# Altium PCB Main_Board.PcbDoc (part 5 of 14)
Units mm, origin at the board's own origin, x right, y up, seen from the top; angles counter-clockwise.
Board outline 142 x 82 mm, 10 copper layers (L1_Top, L2_PWR1, L3_Sig1, L4_GND1, L5_Sig2, L6_Sig3, L7_GND2, L8_Sig4, L9_GND3, L8_Bottom), stack 1.71 mm thick; 299 components, 328 nets, 2329 pads, 2908 vias.
Unrouted connection lines stored in the file: 2.
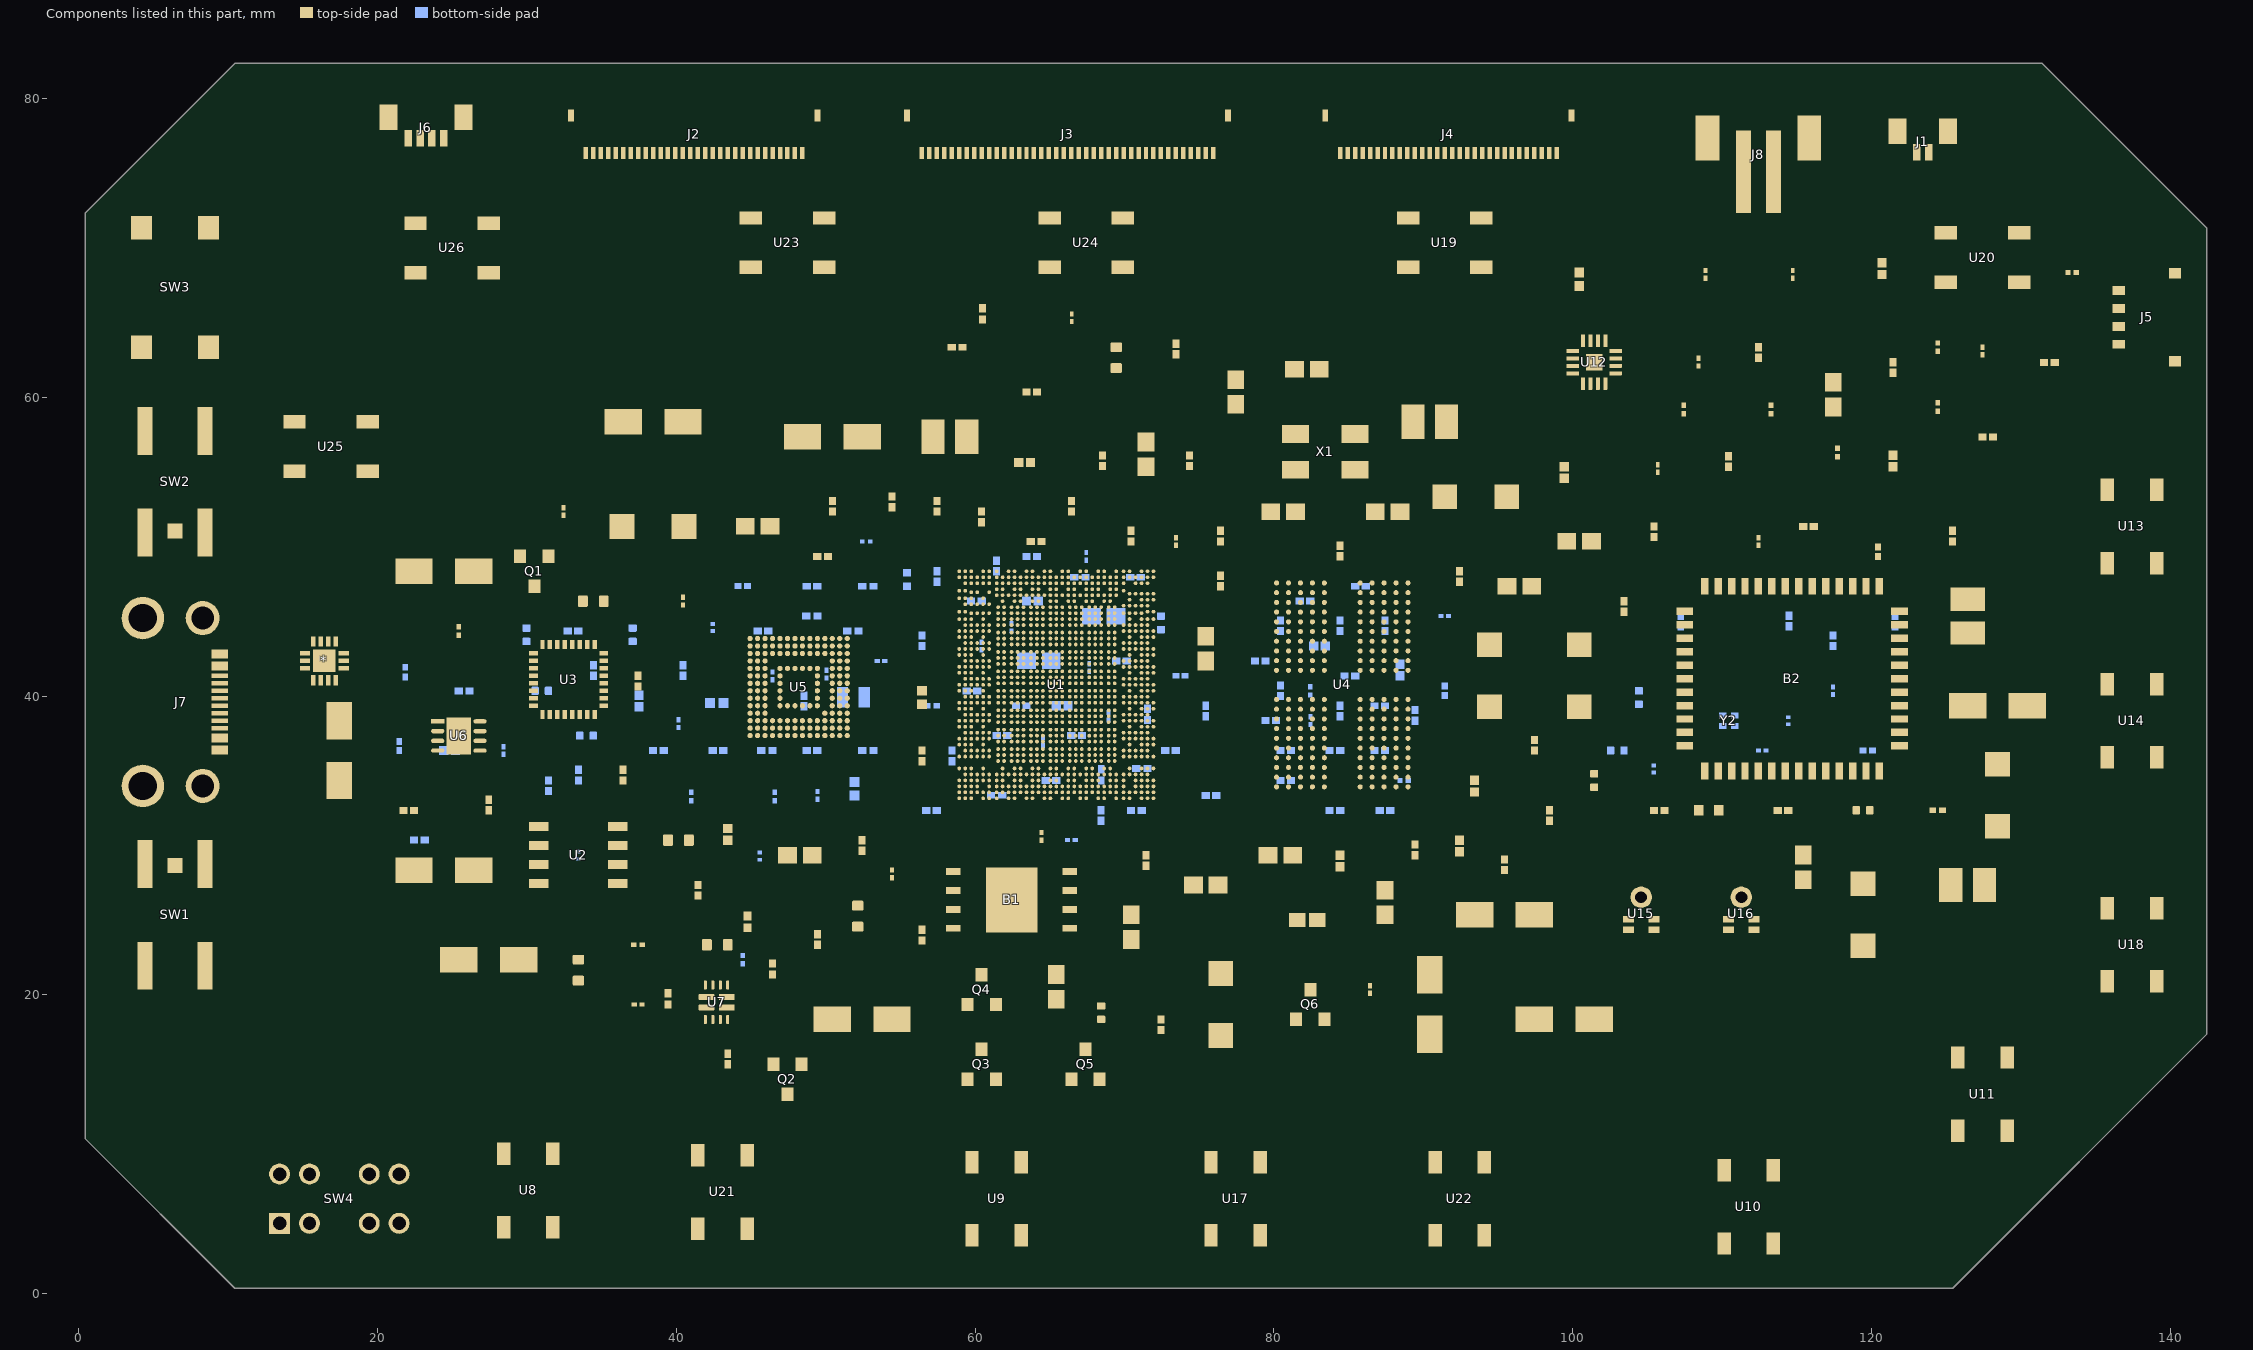
[diagram p13: the components of this part, seen from the top]

## Components (designator, comment, footprint, x,y, rotation, side; value= is the part's Value field where it differs from the comment) (continued)
C124 "GRM155R60G106ME47D" FP-GRM155-0_2-0_1-IPC_C 24.83,36.349 r180 bottom value=10µF
C125 "CC0201KRX5R7BB104" FP-CC0201-BA-IPC_A 56.441,43.704 r90 bottom value=100nF
C126 "GRM0335C1E220FA01D" FP-GRM033-0_03-MFG 105.441,35.112 r90 bottom value=22pF
C127 "GRM0335C1E220FA01D" FP-GRM033-0_03-MFG 114.441,38.349 r90 bottom value=22pF
C128 "Capacitor 100nF +/-20% 50V 0402" CAPC0402(1005)60_L 37.079,44.101 r90 bottom value=100nF
C129 "Capacitor 10µF +/-40% 6.3V 0402" CAPC0402(1005)60_L 29.967,44.101 r90 bottom value=10µF
C130 "GRM035R60J475ME15J" FP-GRM035-0_09-IPC_B 119.755,36.349 r180 bottom value=4.7µF
C131 "0201ZD105MAT2A" CAPC0603X33X15LL03T05 44.441,22.349 r270 bottom value=1µF
C132 "CC0201KRX5R7BB104" FP-CC0201-BA-IPC_A 115.796,51.349 r180 top value=100nF
C133 "CC0201KRX5R7BB104" FP-CC0201-BA-IPC_A 58.796,63.349 r180 top value=100nF
C134 "Capacitor 10µF +/-20% 10V 0603" CAPC0603(1608)100_L 69.441,62.649 r90 top value=10µF
C135 "Capacitor 10µF +/-20% 10V 0603" CAPC0603(1608)100_L 33.441,21.649 r90 top value=10µF
C136 "Capacitor 10µF +/-20% 10V 0603" CAPC0603(1608)100_L 42.741,23.349 r180 top value=10µF
C137 "Capacitor 100nF +/-20% 50V 0402" CAPC0402(1005)60_L 68.441,18.799 r90 top value=100nF
C138 "GRM035R60J475ME15J" FP-GRM035-0_09-IPC_B 120.441,49.663 r90 top value=4.7µF
C139 "0201YC221KAT2A" CAPC0603X33X15LL03T05 37.441,23.349 r180 top value=220pF
C140 "0201YC221KAT2A" CAPC0603X33X15LL03T05 25.441,44.349 r90 top value=220pF
C141 "Capacitor 10µF +/-40% 6.3V 0402" CAPC0402(1005)60_L 101.441,34.349 r90 top value=10µF
C142 "CC0201KRX5R7BB104" FP-CC0201-BA-IPC_A 105.796,32.349 r0 top value=100nF
C143 "Capacitor 10µF +/-40% 6.3V 0402" CAPC0402(1005)60_L 119.441,32.349 r0 top value=10µF
C144 "CC0201KRX5R7BB104" FP-CC0201-BA-IPC_A 114.087,32.349 r0 top value=100nF
C145 "Capacitor 10µF +/-20% 10V 0603" CAPC0603(1608)100_L 34.441,46.349 r180 top value=10µF
C146 "Capacitor 10µF +/-20% 10V 0603" CAPC0603(1608)100_L 40.141,30.349 r180 top value=10µF
C147 "Capacitor 0.1 uF +/- 5% 16 V 0402" CAPC1005X56X25LL10T15 44.776,24.884 r90 top value=100nF
C148 "Capacitor 10µF +/-20% 10V 0603" CAPC0603(1608)100_L 52.142,25.265 r90 top value=10µF
C149 "CC0201KRX5R7BB104" FP-CC0201-BA-IPC_A 117.441,43.704 r90 bottom value=100nF
C150 "CC0201KRX5R7BB104" FP-CC0201-BA-IPC_A 114.477,45.016 r90 bottom value=100nF
C151 "CC0201KRX5R7BB104" FP-CC0201-BA-IPC_A 107.238,45.016 r90 bottom value=100nF
D1 "SBRT3U45SA-13" FP-SMA-MFG 17.441,36.349 r90 top
D2 "SBRT3U45SA-13" FP-SMA-MFG 24.441,28.349 r180 top
D3 "SBRT3U45SA-13" FP-SMA-MFG 95.441,25.349 r180 top
D4 "SBRT3U45SA-13" FP-SMA-MFG 128.441,39.349 r0 top
D5 "SBRT3U45SA-13" FP-SMA-MFG 24.441,48.349 r0 top
D6 "SBRT3U45SA-13" FP-SMA-MFG 27.441,22.349 r0 top
D7 "SBRT3U45SA-13" FP-SMA-MFG 50.441,57.349 r0 top
D8 "SBRT3U45SA-13" FP-SMA-MFG 38.441,58.349 r180 top
D9 "SBRT3U45SA-13" FP-SMA-MFG 99.441,18.349 r180 top
D10 "SBRT3U45SA-13" FP-SMA-MFG 90.441,19.349 r90 top
D11 "PTVS33VP1BPLJ" FP-SOD128FL-1-CA_MFG 93.516,53.349 r0 top
D12 "SBRT3U45SA-13" FP-SMA-MFG 52.441,18.349 r180 top
D13 "PTVS33VP1BPLJ" FP-SOD128FL-1-CA_MFG 128.441,33.349 r90 top
D14 "PTVS33VP1BPLJ" FP-SOD128FL-1-CA_MFG 76.441,19.349 r90 top
D15 "PTVS33VP1BPLJ" FP-SOD128FL-1-CA_MFG 94.441,41.349 r90 top
D16 "PTVS33VP1BPLJ" FP-SOD128FL-1-CA_MFG 100.441,41.349 r270 top
D17 "PTVS33VP1BPLJ" FP-SOD128FL-1-CA_MFG 38.441,51.349 r0 top
D18 "PTVS33VP1BPLJ" FP-SOD128FL-1-CA_MFG 119.441,25.349 r270 top
J1 "BM02B-SURS-TF(LF)(SN)" FP-BM02B-SURS-TF_LF_SN-MFG 123.441,77.349 r0 top
J2 "FH34SRJ-30S-0.5SH_99_" FH34SRJ30S05SH99 41.191,77.499 r180 top
J3 "FH34SRJ-40S-0.5SH_50_" FH34SRJ40S05SH50 66.191,77.499 r180 top
J4 "FH34SRJ-30S-0.5SH_99_" FH34SRJ30S05SH99 91.691,77.499 r180 top
J5 "78171-0004" 781710004 138.441,65.349 r90 top
J6 "BM04B-SURS-TF(LF)(SN)" JST_BM04B-SURS-TF(LF)(SN) 23.241,78.299 r0 top
J7 "HC-TYPE-C-16P-CB1.0" HCTYPEC16PCB10 5.816,39.599 r270 top
J8 "B2B-PH-SM4-TB(LF)(SN)" FP-B2B-PH-SM4-TB_LF_SN-MFG 112.441,77.349 r0 top
L1 "LQP03TNR11H02D" FP-LQP03PN_02-MFG 52.716,50.349 r180 bottom
L2 "LQM2HPN2R2MJ0L" FP-LQM2HPN_J0-IPC_A 90.441,58.349 r0 top value=2.2µH
L3 "LQM2HPN2R2MJ0L" FP-LQM2HPN_J0-IPC_A 58.316,57.349 r0 top value=2.2µH
L4 "LQM2HPN2R2MJ0L" FP-LQM2HPN_J0-IPC_A 126.441,27.349 r0 top
L5 "LQM2HPN2R2MJ0L" FP-LQM2HPN_J0-IPC_A 126.441,45.349 r270 top
L6 "LQM18DN100M70L" FP-LQM18DN_70-MFG 109.116,32.349 r0 top value=1.365H
L7 "LQM18DN100M70L" FP-LQM18DN_70-IPC_B 82.241,25.011 r0 top
Q1 "DMN3042L-13" FP-SOT23-MFG 30.491,48.349 r270 top
Q2 "DMN3042L-13" FP-SOT23-MFG 47.441,14.349 r270 top
Q3 "DMN3042L-13" FP-SOT23-MFG 60.441,15.349 r90 top
Q4 "DMN3042L-13" FP-SOT23-MFG 60.441,20.349 r90 top
Q5 "DMN3042L-13" FP-SOT23-MFG 67.391,15.349 r90 top
Q6 "DMN3042L-13" FP-SOT23-MFG 82.441,19.349 r90 top
R1 "RMCF0201JT100R" FP-RMCF0201-IPC_A 87.441,32.349 r0 bottom value=100
R2 "RMCF0201JT3R30" FP-RMCF0201-IPC_A 70.741,47.949 r180 bottom value=3.3
R3 "MCRE000140" RESC0603X26X15NL03T05 57.116,39.349 r180 bottom value=1k
R4 "RMCF0201JT100R" FP-RMCF0201-IPC_A 63.796,49.349 r0 bottom value=100
R5 "HCJ0201ZT0R00" FP-HCJ0201-IPC_C 112.696,36.349 r180 bottom value=0
R6 "CRCW020122R0JNED" RESC0603X28X15ML05T05 52.816,47.349 r180 bottom value=22
R11 "ERJ-1GNF2261C" FP-ERJ1GN-IPC_B 73.746,41.349 r180 bottom value=2.26k
R14 "RT0201BRE0710KL" FP-RT0201-IPC_C 117.441,40.349 r90 bottom value=10k
R15 "RT0201BRE0710KL" FP-RT0201-IPC_C 28.441,36.349 r90 bottom value=10k
R16 "RMCF0201JT4K70" FP-RMCF0201-IPC_A 49.087,36.349 r180 bottom value=4.7k
R17 "RT0201BRE0710KL" FP-RT0201-IPC_C 46.441,41.349 r270 bottom value=10k
R18 "RMCF0201JT4K70" FP-RMCF0201-IPC_A 48.555,39.661 r90 bottom value=4.7k
R19 "CRCW020156K0JNED" RESC0603X28X15ML05T05 61.441,33.349 r0 bottom value=56k
R20 "RMCF0201JT2K00" FP-RMCF0201-IPC_A 31.441,33.995 r90 bottom value=2k
R21 "HCJ0201ZT0R00" FP-HCJ0201-IPC_C 49.441,33.349 r270 bottom value=0
R22 "RMCF0201JT100R" FP-RMCF0201-IPC_A 64.087,50.349 r180 top value=100
R23 "RMCF0201JT2K00" FP-RMCF0201-IPC_A 73.458,63.228 r90 top value=2k
R24 "HCJ0201ZT0R00" FP-HCJ0201-IPC_C 66.472,65.323 r90 top value=0
R25 "CRCW020139K0JNED" RESC0603X28X15ML05T05 60.503,65.577 r90 top value=39k
R26 "RMCF0201JT100R" FP-RMCF0201-IPC_A 112.441,62.995 r90 top value=100
R27 "RT0201BRE0710KL" FP-RT0201-IPC_C 114.739,68.227 r90 top value=10k
R28 "RT0201BRE0710KL" FP-RT0201-IPC_C 108.897,68.227 r90 top value=10k
R29 "RT0201BRE0710KL" FP-RT0201-IPC_C 108.441,62.349 r90 top value=10k
R30 "RT0201BRE0710KL" FP-RT0201-IPC_C 105.7,55.227 r90 top value=10k
R31 "HCJ0201ZT0R00" FP-HCJ0201-IPC_C 40.141,38.152 r90 bottom value=0
R32 "RT0201BRE0710KL" FP-RT0201-IPC_C 32.441,52.349 r90 top value=10k
R33 "RMCF0201JT100R" FP-RMCF0201-IPC_A 57.441,52.704 r90 top value=100
R34 "RT0201BRE0710KL" FP-RT0201-IPC_C 40.441,46.349 r90 top value=10k
R35 "RMCF0201JT100R" FP-RMCF0201-IPC_A 37.441,40.995 r90 top value=100
R36 "HCJ0201ZT0R00" FP-HCJ0201-IPC_C 73.441,50.349 r90 top value=0
R37 "RT0201BRE0710KL" FP-RT0201-IPC_C 64.541,36.949 r90 bottom value=10k
R38 "RT0201BRE0710KL" FP-RT0201-IPC_C 86.441,20.349 r90 top value=10k
R39 "RT0201BRE0710KL" FP-RT0201-IPC_C 82.441,38.349 r90 bottom value=10k
R40 "RT0201BRE0710KL" FP-RT0201-IPC_C 68.941,38.649 r90 bottom value=10k
R41 "RMCF0201JT4K70" FP-RMCF0201-IPC_A 125.441,50.704 r90 top value=4.7k
R42 "RT0201BRE0710KL" FP-RT0201-IPC_C 112.441,50.349 r270 top value=10k
R43 "CRCW020122R0JNED" RESC0603X28X15ML05T05 52.816,36.349 r0 bottom value=22
R44 "CRCW020122R0JNED" RESC0603X28X15ML05T05 49.066,45.349 r0 bottom value=22
R45 "RT0201BRE0710KL" FP-RT0201-IPC_C 54.441,28.095 r90 top value=10k
R46 "RMCF0201JT4K70" FP-RMCF0201-IPC_A 57.087,32.349 r0 bottom value=4.7k
R47 "RMCF0201JT4K70" FP-RMCF0201-IPC_A 38.796,36.349 r180 bottom value=4.7k
R48 "RT0201BRE0710KL" FP-RT0201-IPC_C 64.441,30.604 r90 top value=10k
R49 "RMCF0201JT4K70" FP-RMCF0201-IPC_A 36.441,34.704 r90 top value=4.7k
R50 "RMCF0201JT47K0" FP-RMCF0201-IPC_A 49.441,23.704 r90 top
R51 "RT0201BRE0710KL" FP-RT0201-IPC_C 66.441,30.349 r180 bottom value=10k
R52 "CRCW020122R0JNED" RESC0603X28X15ML05T05 68.441,34.724 r90 bottom value=22
R53 "CRCW020122R0JNED" RESC0603X28X15ML05T05 71.541,38.774 r90 bottom value=22
R54 "CRCW020122R0JNED" RESC0603X28X15ML05T05 71.166,35.149 r180 bottom value=22
R55 "AF0201FR-07499RL" FP-AF0201-IPC_B 21.441,36.654 r90 bottom value=499
R56 "CRCW020122R0JNED" RESC0603X28X15ML05T05 67.016,47.949 r0 bottom value=22
R57 "RT0201BRE0710KL" FP-RT0201-IPC_C 53.696,42.349 r180 bottom value=10k
R58 "RMCF0201JT47K0" FP-RMCF0201-IPC_A 121.441,61.995 r90 top
R59 "RMCF0201JT47K0" FP-RMCF0201-IPC_A 25.796,40.349 r180 bottom
R60 "RMCF0201JT100R" FP-RMCF0201-IPC_A 76.441,47.704 r90 top value=100
R61 "RT0201BRE0710KL" FP-RT0201-IPC_C 67.441,49.349 r90 bottom value=10k
R62 "HCJ0201ZT0R00" FP-HCJ0201-IPC_C 60.441,43.349 r90 bottom value=0
R63 "HCJ0201ZT0R00" FP-HCJ0201-IPC_C 91.441,45.349 r180 bottom value=0
R64 "RMCF0201JT100R" FP-RMCF0201-IPC_A 22.087,32.349 r180 top value=100
R65 "CRG0201F100K" RESC0603X26X15NL03T05 21.855,41.593 r90 bottom value=100k
R66 "CRCW020122K0JNED" RESC0603X28X15ML05T05 51.816,44.349 r180 bottom value=22k
R67 "CRCW02015K10JNED" RESC0603X28X15ML05T05 46.066,36.349 r180 bottom value=5.1k
R68 "RT0201BRE0710KL" FP-RT0201-IPC_C 50.049,41.466 r90 bottom value=10k
R69 "CRG0201F100K" RESC0603X26X15NL03T05 124.441,32.349 r180 top value=100k
R70 "HCJ0201ZT0R00" FP-HCJ0201-IPC_C 127.441,63.095 r90 top value=0
R71 "CRCW02015K10JNED" RESC0603X28X15ML05T05 46.441,21.724 r270 top value=5.1k
R72 "RMCF0201JT100R" FP-RMCF0201-IPC_A 70.441,50.704 r90 top value=100
R73 "CRCW02015K10JNED" RESC0603X28X15ML05T05 39.441,19.724 r270 top value=5.1k
R74 "RMCF0201JT13K0" FP-RMCF0201-IPC_A 43.441,15.704 r270 top value=13k
R75 "RMCF0201JT2R20" FP-RMCF0201-IPC_A 49.796,49.349 r180 top value=2.2
R76 "RMCF0201JT2R20" FP-RMCF0201-IPC_A 27.441,32.704 r90 top value=2.2
R77 "HCJ0201ZT0R00" FP-HCJ0201-IPC_C 67.641,41.904 r90 bottom value=0
R78 "HCJ0201ZT0R00" FP-HCJ0201-IPC_C 62.441,44.604 r90 bottom value=0
R79 "HCJ0201ZT0R00" FP-HCJ0201-IPC_C 37.441,19.349 r0 top value=0
SW1 "EVQ-Q2H03W" FP-EVQ-Q2H03W-MFG 6.441,25.349 r270 top
SW2 "EVQ-Q2H03W" FP-EVQ-Q2H03W-MFG 6.441,54.349 r90 top
SW3 "B3FS-1012P" FP-B3FS-1012P-MFG 6.441,67.349 r90 top
SW4 "JS203011AQN" FP-JS203011AQN-MFG 17.441,5.349 r0 top
U1 "Amlogic A311D2" BGA1058C40P33X37_1430X1610X110 65.568,40.849 r0 top
U2 "PCF8563T/5,518" FP-SOT96-1-MFG 33.441,29.349 r180 top
U3 "STM32G031K6U6" UFQFPN-32 32.791,41.099 r0 top
U4 "MT53D1024M32D4DT-046_AIT_D" BGA200C65P12X22_1000X1450X95 84.58,40.743 r180 top
U5 "KLMAG2GEND-B031" BGA153N50P14X14_1150X1300X80N 48.191,40.599 r180 top
U6 "TPS2115ADRBR" FP-DRB0008B-IPC_B 25.443,37.324 r0 top
U7 "TPS2121RUXR" FP-RUX0012A-MFG 42.691,19.499 r0 top
U8 "WS2812B-B" LED_WS2812B-B 30.091,6.899 r90 top
U9 "WS2812B-B" LED_WS2812B-B 61.441,6.349 r90 top
U10 "WS2812B-B" LED_WS2812B-B 111.791,5.799 r90 top
U11 "WS2812B-B" LED_WS2812B-B 127.441,13.349 r90 top
U12 "MAX98357AETE+T" QFN50P300X300X80-17N 101.441,62.349 r90 top
U13 "WS2812B-B" LED_WS2812B-B 137.441,51.349 r270 top
U14 "WS2812B-B" LED_WS2812B-B 137.441,38.349 r90 top
U15 "IM67D120AXTSA1" FP-PG-LLGA-5-MFG#1 104.591,25.849 r0 top
U16 "IM67D120AXTSA1" FP-PG-LLGA-5-MFG#2 111.291,25.849 r0 top
U17 "WS2812B-B" LED_WS2812B-B 77.441,6.349 r90 top
U18 "WS2812B-B" LED_WS2812B-B 137.441,23.349 r90 top
U19 "WS2812B-B" LED_WS2812B-B 91.441,70.349 r0 top
U20 "WS2812B-B" LED_WS2812B-B 127.441,69.349 r0 top
U21 "WS2812B-B" LED_WS2812B-B 43.091,6.799 r90 top
U22 "WS2812B-B" LED_WS2812B-B 92.441,6.349 r90 top
U23 "WS2812B-B" LED_WS2812B-B 47.441,70.349 r0 top
U24 "WS2812B-B" LED_WS2812B-B 67.441,70.349 r0 top
U25 "WS2812B-B" LED_WS2812B-B 16.891,56.699 r0 top
U26 "WS2812B-B" LED_WS2812B-B 24.991,69.999 r0 top
X1 "ABM3B-24.000MHZ-B2-T" ABRA-ABM3B-4_V 83.441,56.349 r180 top
Y1 "ABS06-127-32.768KHZ-T" FP-ABS06-MFG 51.857,39.915 r180 bottom
Y2 "ABM13W-37.4000MHZ-5-K1Z-T5" FP-ABM13W-MFG 110.441,38.349 r0 bottom

## Footprints (in the part's own frame and the unit in brackets; to place one, negate y for a bottom-side part, rotate by r counter-clockwise, add the part's x,y. Pads: shape width x height; smd on the part's side, far side on the other; paste and mask are expansions set on the pad)
781710004 [mm]
  rect 0.6x0.85 smd: 1(-1.8,1.875) 2(-0.6,1.875) 3(0.6,1.875) 4(1.8,1.875)
  rect 0.7x0.8 smd: MP1(-2.95,-1.9) MP2(2.95,-1.9)
  silkscreen extent -3.3,-2.62 3.3,2.6, body extent -3.17,-2.76 3.43,1.77, height 1.4
ABRA-ABM3B-4_V [mm] "SMD, 4-Leads, Body 5x3.2mm"
  rect 1.8x1.2 smd: 1(-2,-1.2) 2(2,-1.2) 3(2,1.2) 4(-2,1.2)
  silkscreen extent -3.58,-1.6 2.5,1.6, body extent -2.5,-1.59 2.5,1.59, height 1.13
AP6275S [mm]
  rect 1.125x0.5 smd: 1(-7.188,4.5) 2(-7.188,3.6) 3(-7.188,2.7) 4(-7.188,1.8) 5(-7.188,0.9) 6(-7.188,0) 7(-7.188,-0.9) 8(-7.188,-1.8) 9(-7.188,-2.7) 10(-7.188,-3.6) 11(-7.188,-4.5) 26(7.188,-4.5) 27(7.188,-3.6) 28(7.188,-2.7) 29(7.188,-1.8) 30(7.188,-0.9) 31(7.188,0) 32(7.188,0.9) 33(7.188,1.8) 34(7.188,2.7) 35(7.188,3.6) 36(7.188,4.5)
  rect 0.5x1.125 smd: 12(-5.85,-6.188) 13(-4.95,-6.188) 14(-4.05,-6.188) 15(-3.15,-6.188) 16(-2.25,-6.188) 17(-1.35,-6.188) 18(-0.45,-6.188) 19(0.45,-6.188) 20(1.35,-6.188) 21(2.25,-6.188) 22(3.15,-6.188) 23(4.05,-6.188) 24(4.95,-6.188) 25(5.85,-6.188) 37(5.85,6.188) 38(4.95,6.188) 39(4.05,6.188) 40(3.15,6.188) 41(2.25,6.188) 42(1.35,6.188) 43(0.45,6.188) 44(-0.45,6.188) 45(-1.35,6.188) 46(-2.25,6.188) 47(-3.15,6.188) 48(-4.05,6.188) 49(-4.95,6.188) 50(-5.85,6.188)
  silkscreen extent -8.3,-6.5 7.5,6.5, body extent -7.5,-6.5 7.5,6.5, height 1.65
BGA153N50P14X14_1150X1300X80N [mm]
  round 0.35 smd: A1(-3.25,3.25) A2(-2.75,3.25) A3(-2.25,3.25) A4(-1.75,3.25) A5(-1.25,3.25) A6(-0.75,3.25) A7(-0.25,3.25) A8(0.25,3.25) A9(0.75,3.25) A10(1.25,3.25) A11(1.75,3.25) A12(2.25,3.25) A13(2.75,3.25) A14(3.25,3.25) B1(-3.25,2.75) B2(-2.75,2.75) B3(-2.25,2.75) B4(-1.75,2.75) B5(-1.25,2.75) B6(-0.75,2.75) B7(-0.25,2.75) B8(0.25,2.75) B9(0.75,2.75) B10(1.25,2.75) B11(1.75,2.75) B12(2.25,2.75) B13(2.75,2.75) B14(3.25,2.75) C1(-3.25,2.25) C2(-2.75,2.25) C3(-2.25,2.25) C4(-1.75,2.25) C5(-1.25,2.25) C6(-0.75,2.25) C7(-0.25,2.25) C8(0.25,2.25) C9(0.75,2.25) C10(1.25,2.25) C11(1.75,2.25) C12(2.25,2.25) C13(2.75,2.25) C14(3.25,2.25) D1(-3.25,1.75) D2(-2.75,1.75) D3(-2.25,1.75) D4(-1.75,1.75) D12(2.25,1.75) D13(2.75,1.75) D14(3.25,1.75) E1(-3.25,1.25) E2(-2.75,1.25) E3(-2.25,1.25) E5(-1.25,1.25) E6(-0.75,1.25) E7(-0.25,1.25) E8(0.25,1.25) E9(0.75,1.25) E10(1.25,1.25) E12(2.25,1.25) E13(2.75,1.25) E14(3.25,1.25) F1(-3.25,0.75) F2(-2.75,0.75) F3(-2.25,0.75) F5(-1.25,0.75) F10(1.25,0.75) F12(2.25,0.75) F13(2.75,0.75) F14(3.25,0.75) G1(-3.25,0.25) G2(-2.75,0.25) G3(-2.25,0.25) G5(-1.25,0.25) G10(1.25,0.25) G12(2.25,0.25) G13(2.75,0.25) G14(3.25,0.25) H1(-3.25,-0.25) H2(-2.75,-0.25) H3(-2.25,-0.25) H5(-1.25,-0.25) H10(1.25,-0.25) H12(2.25,-0.25) H13(2.75,-0.25) H14(3.25,-0.25) J1(-3.25,-0.75) J2(-2.75,-0.75) J3(-2.25,-0.75) J5(-1.25,-0.75) J10(1.25,-0.75) J12(2.25,-0.75) J13(2.75,-0.75) J14(3.25,-0.75) K1(-3.25,-1.25) K2(-2.75,-1.25) K3(-2.25,-1.25) K5(-1.25,-1.25) K6(-0.75,-1.25) K7(-0.25,-1.25) K8(0.25,-1.25) K9(0.75,-1.25) K10(1.25,-1.25) K12(2.25,-1.25) K13(2.75,-1.25) K14(3.25,-1.25) L1(-3.25,-1.75) L2(-2.75,-1.75) L3(-2.25,-1.75) L12(2.25,-1.75) L13(2.75,-1.75) L14(3.25,-1.75) M1(-3.25,-2.25) M2(-2.75,-2.25) M3(-2.25,-2.25) M4(-1.75,-2.25) M5(-1.25,-2.25) M6(-0.75,-2.25) M7(-0.25,-2.25) M8(0.25,-2.25) M9(0.75,-2.25) M10(1.25,-2.25) M11(1.75,-2.25) M12(2.25,-2.25) M13(2.75,-2.25) M14(3.25,-2.25) N1(-3.25,-2.75) N2(-2.75,-2.75) N3(-2.25,-2.75) N4(-1.75,-2.75) N5(-1.25,-2.75) N6(-0.75,-2.75) N7(-0.25,-2.75) N8(0.25,-2.75) N9(0.75,-2.75) N10(1.25,-2.75) N11(1.75,-2.75) N12(2.25,-2.75) N13(2.75,-2.75) N14(3.25,-2.75) P1(-3.25,-3.25) P2(-2.75,-3.25) P3(-2.25,-3.25) P4(-1.75,-3.25) P5(-1.25,-3.25) P6(-0.75,-3.25) P7(-0.25,-3.25) P8(0.25,-3.25) P9(0.75,-3.25) P10(1.25,-3.25) P11(1.75,-3.25) P12(2.25,-3.25) P13(2.75,-3.25) P14(3.25,-3.25)
  silkscreen extent -6.6,-6.55 5.8,6.55, body extent -5.8,-6.55 5.8,6.55, height 0.8
BGA200C65P12X22_1000X1450X95 [mm]
  round 0.34 smd: A1(-4.4,6.825) A2(-3.6,6.825) A3(-2.8,6.825) A4(-2,6.825) A5(-1.2,6.825) A8(1.2,6.825) A9(2,6.825) A10(2.8,6.825) A11(3.6,6.825) A12(4.4,6.825) AA1(-4.4,-6.175) AA2(-3.6,-6.175) AA3(-2.8,-6.175) AA4(-2,-6.175) AA5(-1.2,-6.175) AA8(1.2,-6.175) AA9(2,-6.175) AA10(2.8,-6.175) AA11(3.6,-6.175) AA12(4.4,-6.175) AB1(-4.4,-6.825) AB2(-3.6,-6.825) AB3(-2.8,-6.825) AB4(-2,-6.825) AB5(-1.2,-6.825) AB8(1.2,-6.825) AB9(2,-6.825) AB10(2.8,-6.825) AB11(3.6,-6.825) AB12(4.4,-6.825) B1(-4.4,6.175) B2(-3.6,6.175) B3(-2.8,6.175) B4(-2,6.175) B5(-1.2,6.175) B8(1.2,6.175) B9(2,6.175) B10(2.8,6.175) B11(3.6,6.175) B12(4.4,6.175) C1(-4.4,5.525) C2(-3.6,5.525) C3(-2.8,5.525) C4(-2,5.525) C5(-1.2,5.525) C8(1.2,5.525) C9(2,5.525) C10(2.8,5.525) C11(3.6,5.525) C12(4.4,5.525) D1(-4.4,4.875) D2(-3.6,4.875) D3(-2.8,4.875) D4(-2,4.875) D5(-1.2,4.875) D8(1.2,4.875) D9(2,4.875) D10(2.8,4.875) D11(3.6,4.875) D12(4.4,4.875) E1(-4.4,4.225) E2(-3.6,4.225) E3(-2.8,4.225) E4(-2,4.225) E5(-1.2,4.225) E8(1.2,4.225) E9(2,4.225) E10(2.8,4.225) E11(3.6,4.225) E12(4.4,4.225) F1(-4.4,3.575) F2(-3.6,3.575) F3(-2.8,3.575) F4(-2,3.575) F5(-1.2,3.575) F8(1.2,3.575) F9(2,3.575) F10(2.8,3.575) F11(3.6,3.575) F12(4.4,3.575) G1(-4.4,2.925) G2(-3.6,2.925) G3(-2.8,2.925) G4(-2,2.925) G5(-1.2,2.925) G8(1.2,2.925) G9(2,2.925) G10(2.8,2.925) G11(3.6,2.925) G12(4.4,2.925) H1(-4.4,2.275) H2(-3.6,2.275) H3(-2.8,2.275) H4(-2,2.275) H5(-1.2,2.275) H8(1.2,2.275) H9(2,2.275) H10(2.8,2.275) H11(3.6,2.275) H12(4.4,2.275) J1(-4.4,1.625) J2(-3.6,1.625) J3(-2.8,1.625) J4(-2,1.625) J5(-1.2,1.625) J8(1.2,1.625) J9(2,1.625) J10(2.8,1.625) J11(3.6,1.625) J12(4.4,1.625) K1(-4.4,0.975) K2(-3.6,0.975) K3(-2.8,0.975) K4(-2,0.975) K5(-1.2,0.975) K8(1.2,0.975) K9(2,0.975) K10(2.8,0.975) K11(3.6,0.975) K12(4.4,0.975) N1(-4.4,-0.975) N2(-3.6,-0.975) N3(-2.8,-0.975) N4(-2,-0.975) N5(-1.2,-0.975) N8(1.2,-0.975) N9(2,-0.975) N10(2.8,-0.975) N11(3.6,-0.975) N12(4.4,-0.975) P1(-4.4,-1.625) P2(-3.6,-1.625) P3(-2.8,-1.625) P4(-2,-1.625) P5(-1.2,-1.625) P8(1.2,-1.625) P9(2,-1.625) P10(2.8,-1.625) P11(3.6,-1.625) P12(4.4,-1.625) R1(-4.4,-2.275) R2(-3.6,-2.275) R3(-2.8,-2.275) R4(-2,-2.275) R5(-1.2,-2.275) R8(1.2,-2.275) R9(2,-2.275) R10(2.8,-2.275) R11(3.6,-2.275) R12(4.4,-2.275) T1(-4.4,-2.925) T2(-3.6,-2.925) T3(-2.8,-2.925) T4(-2,-2.925) T5(-1.2,-2.925) T8(1.2,-2.925) T9(2,-2.925) T10(2.8,-2.925) T11(3.6,-2.925) T12(4.4,-2.925) U1(-4.4,-3.575) U2(-3.6,-3.575) U3(-2.8,-3.575) U4(-2,-3.575) U5(-1.2,-3.575) U8(1.2,-3.575) U9(2,-3.575) U10(2.8,-3.575) U11(3.6,-3.575) U12(4.4,-3.575) V1(-4.4,-4.225) V2(-3.6,-4.225) V3(-2.8,-4.225) V4(-2,-4.225) V5(-1.2,-4.225) V8(1.2,-4.225) V9(2,-4.225) V10(2.8,-4.225) V11(3.6,-4.225) V12(4.4,-4.225) W1(-4.4,-4.875) W2(-3.6,-4.875) W3(-2.8,-4.875) W4(-2,-4.875) W5(-1.2,-4.875) W8(1.2,-4.875) W9(2,-4.875) W10(2.8,-4.875) W11(3.6,-4.875) W12(4.4,-4.875) Y1(-4.4,-5.525) Y2(-3.6,-5.525) Y3(-2.8,-5.525) Y4(-2,-5.525) Y5(-1.2,-5.525) Y8(1.2,-5.525) Y9(2,-5.525) Y10(2.8,-5.525) Y11(3.6,-5.525) Y12(4.4,-5.525)
  silkscreen extent -5.1,-7.34 5,7.44, body extent -4.95,-7.37 4.95,7.37, height 0.25
BGA1058C40P33X37_1430X1610X110 [mm] "BGA, 1058-Leads, Body 14,30x16,10mmx1,10mm, Pitch 0,40mm"
  round 0.25 smd: A1(6.373,7.5) A2(5.973,7.5) A3(5.573,7.5) A5(4.773,7.5) A6(4.373,7.5) A7(3.873,7.5) A9(3.073,7.5) A10(2.673,7.5) A12(1.873,7.5) A13(1.473,7.5) A15(0.673,7.5) A16(0.273,7.5) A18(-0.527,7.5) A19(-0.927,7.5) A21(-1.727,7.5) A22(-2.127,7.5) A24(-2.927,7.5) A25(-3.327,7.5) A27(-4.127,7.5) A28(-4.627,7.5) A29(-5.027,7.5) A31(-5.827,7.5) A32(-6.227,7.5) A33(-6.627,7.5) AA2(5.973,-0.9) AA3(5.573,-0.9) AA4(5.173,-0.9) AA5(4.773,-0.9) AA6(4.373,-0.9) AA8(3.773,-0.9) AA9(3.373,-0.9) AA10(2.873,-0.9) AA11(2.473,-0.9) AA12(2.073,-0.9) AA13(1.573,-0.9) AA14(1.173,-0.9) AA15(0.773,-0.9) AA16(0.273,-0.9) AA17(-0.127,-0.9) AA18(-0.527,-0.9) AA19(-1.027,-0.9) AA20(-1.427,-0.9) AA21(-1.827,-0.9) AA22(-2.327,-0.9) AA23(-2.727,-0.9) AA24(-3.127,-0.9) AA25(-3.627,-0.9) AA26(-4.027,-0.9) AA28(-4.627,-0.9) AA29(-5.027,-0.9) AA30(-5.427,-0.9) AA31(-5.827,-0.9) AA32(-6.227,-0.9) AB1(6.373,-1.3) AB2(5.973,-1.3) AB3(5.573,-1.3) AB4(5.173,-1.3) AB5(4.773,-1.3) AB6(4.373,-1.3) AB8(3.773,-1.3) AB9(3.373,-1.3) AB10(2.873,-1.3) AB11(2.473,-1.3) AB12(2.073,-1.3) AB13(1.573,-1.3) AB14(1.173,-1.3) AB15(0.773,-1.3) AB16(0.273,-1.3) AB17(-0.127,-1.3) AB18(-0.527,-1.3) AB19(-1.027,-1.3) AB20(-1.427,-1.3) AB21(-1.827,-1.3) AB22(-2.327,-1.3) AB23(-2.727,-1.3) AB24(-3.127,-1.3) AB25(-3.627,-1.3) AB26(-4.027,-1.3) AB28(-4.627,-1.3) AB29(-5.027,-1.3) AB30(-5.427,-1.3) AB31(-5.827,-1.3) AB32(-6.227,-1.3) AB33(-6.627,-1.3) AC1(6.373,-1.7) AC2(5.973,-1.7) AC3(5.573,-1.7) AC5(4.773,-1.7) AC8(3.773,-1.8) AC9(3.373,-1.8) AC10(2.873,-1.8) AC11(2.473,-1.8) AC12(2.073,-1.8) AC13(1.573,-1.8) AC14(1.173,-1.8) AC15(0.773,-1.8) AC16(0.273,-1.8) AC17(-0.127,-1.8) AC18(-0.527,-1.8) AC19(-1.027,-1.8) AC20(-1.427,-1.8) AC21(-1.827,-1.8) AC22(-2.327,-1.8) AC23(-2.727,-1.8) AC24(-3.127,-1.8) AC25(-3.627,-1.8) AC26(-4.027,-1.8) AC29(-5.027,-1.7) AC31(-5.827,-1.7) AC32(-6.227,-1.7) AC33(-6.627,-1.7) AD2(5.973,-2.1) AD3(5.573,-2.1) AD4(5.173,-2.1) AD5(4.773,-2.1) AD6(4.373,-2.1) AD8(3.773,-2.2) AD9(3.373,-2.2) AD10(2.873,-2.2) AD11(2.473,-2.2) AD12(2.073,-2.2) AD13(1.573,-2.2) AD14(1.173,-2.2) AD15(0.773,-2.2) AD16(0.273,-2.2) AD17(-0.127,-2.2) AD18(-0.527,-2.2) AD19(-1.027,-2.2) AD20(-1.427,-2.2) AD21(-1.827,-2.2) AD22(-2.327,-2.2) AD23(-2.727,-2.2) AD24(-3.127,-2.2) AD25(-3.627,-2.2) AD26(-4.027,-2.2) AD28(-4.627,-2.1) AD29(-5.027,-2.1) AD30(-5.427,-2.1) AD31(-5.827,-2.1) AD32(-6.227,-2.1) AE1(6.373,-2.5) AE2(5.973,-2.5) AE3(5.573,-2.5) AE4(5.173,-2.5) AE5(4.773,-2.5) AE6(4.373,-2.5) AE8(3.773,-2.6) AE9(3.373,-2.6) AE10(2.873,-2.6) AE11(2.473,-2.6) AE12(2.073,-2.6) AE13(1.573,-2.6) AE14(1.173,-2.6) AE15(0.773,-2.6) AE16(0.273,-2.6) AE17(-0.127,-2.6) AE18(-0.527,-2.6) AE19(-1.027,-2.6) AE20(-1.427,-2.6) AE21(-1.827,-2.6) AE22(-2.327,-2.6) AE23(-2.727,-2.6) AE24(-3.127,-2.6) AE25(-3.627,-2.6) AE26(-4.027,-2.6) AE28(-4.627,-2.5) AE29(-5.027,-2.5) AE30(-5.427,-2.5) AE31(-5.827,-2.5) AE32(-6.227,-2.5) AE33(-6.627,-2.5) AF1(6.373,-2.9) AF2(5.973,-2.9) AF3(5.573,-2.9) AF5(4.773,-2.9) AF8(3.773,-3.1) AF9(3.373,-3.1) AF10(2.873,-3.1) AF11(2.473,-3.1) AF12(2.073,-3.1) AF13(1.573,-3.1) AF14(1.173,-3.1) AF15(0.773,-3.1) AF16(0.273,-3.1) AF17(-0.127,-3.1) AF18(-0.527,-3.1) AF19(-1.027,-3.1) AF20(-1.427,-3.1) AF21(-1.827,-3.1) AF22(-2.327,-3.1) AF23(-2.727,-3.1) AF24(-3.127,-3.1) AF25(-3.627,-3.1) AF26(-4.027,-3.1) AF29(-5.027,-2.9) AF31(-5.827,-2.9) AF32(-6.227,-2.9) AF33(-6.627,-2.9) AG2(5.973,-3.3) AG3(5.573,-3.3) AG4(5.173,-3.3) AG5(4.773,-3.3) AG6(4.373,-3.3) AG8(3.773,-3.5) AG9(3.373,-3.5) AG10(2.873,-3.5) AG11(2.473,-3.5) AG12(2.073,-3.5) AG13(1.573,-3.5) AG14(1.173,-3.5) AG15(0.773,-3.5) AG16(0.273,-3.5) AG17(-0.127,-3.5) AG18(-0.527,-3.5) AG19(-1.027,-3.5) AG20(-1.427,-3.5) AG21(-1.827,-3.5) AG22(-2.327,-3.5) AG23(-2.727,-3.5) AG24(-3.127,-3.5) AG25(-3.627,-3.5) AG26(-4.027,-3.5) AG28(-4.627,-3.3) AG29(-5.027,-3.3) AG30(-5.427,-3.3) AG31(-5.827,-3.3) AG32(-6.227,-3.3) AH1(6.373,-3.7) AH2(5.973,-3.7) AH3(5.573,-3.7) AH4(5.173,-3.7) AH5(4.773,-3.7) AH6(4.373,-3.7) AH8(3.773,-3.9) AH9(3.373,-3.9) AH10(2.873,-3.9) AH11(2.473,-3.9) AH12(2.073,-3.9) AH13(1.573,-3.9) AH14(1.173,-3.9) AH15(0.773,-3.9) AH16(0.273,-3.9) AH17(-0.127,-3.9) AH18(-0.527,-3.9) AH19(-1.027,-3.9) AH20(-1.427,-3.9) AH21(-1.827,-3.9) AH22(-2.327,-3.9) AH23(-2.727,-3.9) AH24(-3.127,-3.9) AH25(-3.627,-3.9) AH26(-4.027,-3.9) AH28(-4.627,-3.7) AH29(-5.027,-3.7) AH30(-5.427,-3.7) AH31(-5.827,-3.7) AH32(-6.227,-3.7) AH33(-6.627,-3.7) AJ1(6.373,-4.1) AJ2(5.973,-4.1) AJ3(5.573,-4.1) AJ5(4.773,-4.1) AJ8(3.773,-4.4) AJ9(3.373,-4.4) AJ10(2.873,-4.4) AJ11(2.473,-4.4) AJ12(2.073,-4.4) AJ13(1.573,-4.4) AJ14(1.173,-4.4) AJ15(0.773,-4.4) AJ16(0.273,-4.4) AJ17(-0.127,-4.4) AJ18(-0.527,-4.4) AJ19(-1.027,-4.4) AJ20(-1.427,-4.4) AJ21(-1.827,-4.4) AJ22(-2.327,-4.4) AJ23(-2.727,-4.4) AJ24(-3.127,-4.4) AJ25(-3.627,-4.4) AJ26(-4.027,-4.4) AJ29(-5.027,-4.1) AJ31(-5.827,-4.1) AJ32(-6.227,-4.1) AJ33(-6.627,-4.1) AK2(5.973,-4.5) AK3(5.573,-4.5) AK4(5.173,-4.5) AK5(4.773,-4.5) AK6(4.373,-4.5) AK8(3.773,-4.8) AK9(3.373,-4.8) AK10(2.873,-4.8) AK11(2.473,-4.8) AK12(2.073,-4.8) AK13(1.573,-4.8) AK14(1.173,-4.8) AK15(0.773,-4.8) AK16(0.273,-4.8) AK17(-0.127,-4.8) AK18(-0.527,-4.8) AK19(-1.027,-4.8) AK20(-1.427,-4.8) AK21(-1.827,-4.8) AK22(-2.327,-4.8) AK23(-2.727,-4.8) AK24(-3.127,-4.8) AK25(-3.627,-4.8) AK26(-4.027,-4.8) AK28(-4.627,-4.5) AK29(-5.027,-4.5) AK30(-5.427,-4.5) AK31(-5.827,-4.5) AK32(-6.227,-4.5) AL1(6.373,-4.9) AL2(5.973,-4.9) AL3(5.573,-4.9) AL4(5.173,-4.9) AL5(4.773,-4.9) AL6(4.373,-4.9) AL8(3.773,-5.2) AL9(3.373,-5.2) AL10(2.873,-5.2) AL11(2.473,-5.2) AL12(2.073,-5.2) AL13(1.573,-5.2) AL14(1.173,-5.2) AL15(0.773,-5.2) AL16(0.273,-5.2) AL17(-0.127,-5.2) AL18(-0.527,-5.2) AL19(-1.027,-5.2) AL20(-1.427,-5.2) AL21(-1.827,-5.2) AL22(-2.327,-5.2) AL23(-2.727,-5.2) AL24(-3.127,-5.2) AL25(-3.627,-5.2) AL26(-4.027,-5.2) AL28(-4.627,-4.9) AL29(-5.027,-4.9) AL30(-5.427,-4.9) AL31(-5.827,-4.9) AL32(-6.227,-4.9) AL33(-6.627,-4.9) AM1(6.373,-5.7) AM2(5.973,-5.7) AM3(5.573,-5.7) AM5(4.773,-5.7) AM8(3.473,-5.7) AM9(3.073,-5.7) AM11(2.273,-5.7) AM12(1.873,-5.7) AM14(1.073,-5.7) AM15(0.673,-5.7) AM17(-0.127,-5.7) AM18(-0.527,-5.7) AM20(-1.327,-5.7) AM21(-1.727,-5.7) AM23(-2.527,-5.7) AM24(-2.927,-5.7) AM26(-3.727,-5.7) AM29(-5.027,-5.7) AM31(-5.827,-5.7) AM32(-6.227,-5.7) AM33(-6.627,-5.7) AN2(5.973,-6.1) AN3(5.573,-6.1) AN4(5.173,-6.1) AN5(4.773,-6.1) AN6(4.373,-6.1) AN7(3.873,-6.1) AN8(3.473,-6.1) AN9(3.073,-6.1) AN10(2.673,-6.1) AN11(2.273,-6.1) AN12(1.873,-6.1) AN13(1.473,-6.1) AN14(1.073,-6.1) AN15(0.673,-6.1) AN16(0.273,-6.1) AN17(-0.127,-6.1) AN18(-0.527,-6.1) AN19(-0.927,-6.1) AN20(-1.327,-6.1) AN21(-1.727,-6.1) AN22(-2.127,-6.1) AN23(-2.527,-6.1) AN24(-2.927,-6.1) AN25(-3.327,-6.1) AN26(-3.727,-6.1) AN27(-4.127,-6.1) AN28(-4.627,-6.1) AN29(-5.027,-6.1) AN30(-5.427,-6.1) AN31(-5.827,-6.1) AN32(-6.227,-6.1) AP1(6.373,-6.5) AP2(5.973,-6.5) AP3(5.573,-6.5) AP4(5.173,-6.5) AP6(4.373,-6.5) AP7(3.873,-6.5) AP8(3.473,-6.5) AP10(2.673,-6.5) AP11(2.273,-6.5) AP12(1.873,-6.5) AP14(1.073,-6.5) AP15(0.673,-6.5) AP17(-0.127,-6.5) AP18(-0.527,-6.5) AP20(-1.327,-6.5) AP21(-1.727,-6.5) AP23(-2.527,-6.5) AP24(-2.927,-6.5) AP26(-3.727,-6.5) AP27(-4.127,-6.5) AP28(-4.627,-6.5) AP29(-5.027,-6.5) AP30(-5.427,-6.5) AP31(-5.827,-6.5) AP32(-6.227,-6.5) AP33(-6.627,-6.5) AR1(6.373,-6.9) AR2(5.973,-6.9) AR3(5.573,-6.9) AR4(5.173,-6.9) AR6(4.373,-6.9) AR7(3.873,-6.9) AR8(3.473,-6.9) AR9(3.073,-6.9) AR10(2.673,-6.9) AR11(2.273,-6.9) AR12(1.873,-6.9) AR13(1.473,-6.9) AR14(1.073,-6.9) AR15(0.673,-6.9) AR16(0.273,-6.9) AR17(-0.127,-6.9) AR18(-0.527,-6.9) AR19(-0.927,-6.9) AR20(-1.327,-6.9) AR21(-1.727,-6.9) AR22(-2.127,-6.9) AR23(-2.527,-6.9) AR24(-2.927,-6.9) AR25(-3.327,-6.9) AR26(-3.727,-6.9) AR27(-4.127,-6.9) AR28(-4.627,-6.9) AR30(-5.427,-6.9) AR31(-5.827,-6.9) AR32(-6.227,-6.9) AR33(-6.627,-6.9) AT1(6.373,-7.3) AT2(5.973,-7.3) AT3(5.573,-7.3) AT4(5.173,-7.3) AT5(4.773,-7.3) AT6(4.373,-7.3) AT7(3.873,-7.3) AT8(3.473,-7.3) AT9(3.073,-7.3) AT10(2.673,-7.3) AT11(2.273,-7.3) AT12(1.873,-7.3) AT13(1.473,-7.3) AT14(1.073,-7.3) AT15(0.673,-7.3) AT16(0.273,-7.3) AT17(-0.127,-7.3) AT18(-0.527,-7.3) AT19(-0.927,-7.3) AT20(-1.327,-7.3) AT21(-1.727,-7.3) AT22(-2.127,-7.3) AT23(-2.527,-7.3) AT24(-2.927,-7.3) AT25(-3.327,-7.3) AT26(-3.727,-7.3) AT27(-4.127,-7.3) AT28(-4.627,-7.3) AT29(-5.027,-7.3) AT30(-5.427,-7.3) AT31(-5.827,-7.3) AT32(-6.227,-7.3) AT33(-6.627,-7.3) AU1(6.373,-7.7) AU2(5.973,-7.7) AU3(5.573,-7.7) AU5(4.773,-7.7) AU6(4.373,-7.7) AU7(3.873,-7.7) AU9(3.073,-7.7) AU10(2.673,-7.7) AU12(1.873,-7.7) AU13(1.473,-7.7) AU15(0.673,-7.7) AU16(0.273,-7.7) AU18(-0.527,-7.7) AU19(-0.927,-7.7) AU21(-1.727,-7.7) AU22(-2.127,-7.7) AU24(-2.927,-7.7) AU25(-3.327,-7.7) AU27(-4.127,-7.7) AU28(-4.627,-7.7) AU29(-5.027,-7.7) AU31(-5.827,-7.7) AU32(-6.227,-7.7) AU33(-6.627,-7.7) B1(6.373,7.1) B2(5.973,7.1) B3(5.573,7.1) B4(5.173,7.1) B5(4.773,7.1) B6(4.373,7.1) B7(3.873,7.1) B8(3.473,7.1) B9(3.073,7.1) B10(2.673,7.1) B11(2.273,7.1) B12(1.873,7.1) B13(1.473,7.1) B14(1.073,7.1) B15(0.673,7.1) B16(0.273,7.1) B17(-0.127,7.1) B18(-0.527,7.1) B19(-0.927,7.1) B20(-1.327,7.1) B21(-1.727,7.1) B22(-2.127,7.1) B23(-2.527,7.1) B24(-2.927,7.1) B25(-3.327,7.1) B26(-3.727,7.1) B27(-4.127,7.1) B28(-4.627,7.1) B29(-5.027,7.1) B30(-5.427,7.1) B31(-5.827,7.1) B32(-6.227,7.1) B33(-6.627,7.1) C2(5.973,6.7) C3(5.573,6.7) C4(5.173,6.7) C6(4.373,6.7) C7(3.873,6.7) C8(3.473,6.7) C9(3.073,6.7) C10(2.673,6.7) C11(2.273,6.7) C12(1.873,6.7) C13(1.473,6.7) C14(1.073,6.7) C15(0.673,6.7) C16(0.273,6.7) C17(-0.127,6.7) C18(-0.527,6.7) C19(-0.927,6.7) C20(-1.327,6.7) C21(-1.727,6.7) C22(-2.127,6.7) C23(-2.527,6.7) C24(-2.927,6.7) C25(-3.327,6.7) C26(-3.727,6.7) C27(-4.127,6.7) C28(-4.627,6.7) C29(-5.027,6.7) C30(-5.427,6.7) C31(-5.827,6.7) C32(-6.227,6.7) D1(6.373,6) D2(5.973,6) D3(5.573,6) D4(5.173,6) D5(4.773,6) D6(4.373,6.2) D7(3.873,6.3) D8(3.473,6.3) D10(2.673,6.3) D11(2.273,6.3) D12(1.873,6.3) D14(1.073,6.3) D15(0.673,6.3) D17(-0.127,6.3) D18(-0.527,6.3) D20(-1.327,6.3) D21(-1.727,6.3) D23(-2.527,6.3) D24(-2.927,6.3) D26(-3.727,6.3) D27(-4.127,6.3) D28(-4.627,6.1) D30(-5.427,6.1) D31(-5.827,6.1) D32(-6.227,6.2) D33(-6.627,6.2) E1(6.373,5.6) E2(5.973,5.6) E3(5.573,5.6) E5(4.773,5.6) E7(3.873,5.9) E8(3.473,5.9) E9(3.073,5.9) E10(2.673,5.9) E11(2.273,5.9) E12(1.873,5.9) E13(1.473,5.9) E14(1.073,5.9) E15(0.673,5.9) E16(0.273,5.9) E17(-0.127,5.9) E18(-0.527,5.9) E19(-0.927,5.9) E20(-1.327,5.9) E21(-1.727,5.9) E22(-2.127,5.9) E23(-2.527,5.9) E24(-2.927,5.9) E25(-3.327,5.9) E26(-3.727,5.9) E27(-4.127,5.9) E29(-5.027,5.7) E31(-5.827,5.7) E32(-6.227,5.7) E33(-6.627,5.7) F2(5.973,5.2) F3(5.573,5.2) F4(5.173,5.2) F5(4.773,5.2) F6(4.373,5.2) F8(3.473,5.5) F9(3.073,5.5) F11(2.273,5.5) F12(1.873,5.5) F14(1.073,5.5) F15(0.673,5.5) F17(-0.127,5.5) F18(-0.527,5.5) F20(-1.327,5.5) F21(-1.727,5.5) F23(-2.527,5.5) F24(-2.927,5.5) F26(-3.727,5.5) F28(-4.627,5.3) F29(-5.027,5.3) F30(-5.427,5.3) F31(-5.827,5.3) F32(-6.227,5.3) G1(6.373,4.8) G2(5.973,4.8) G3(5.573,4.7) G4(5.173,4.7) G5(4.773,4.7) G6(4.373,4.7) G8(3.773,5.1) G9(3.373,5.1) G10(2.873,5.1) G11(2.473,5.1) G12(2.073,5.1) G13(1.573,5.1) G14(1.173,5.1) G15(0.773,5.1) G16(0.273,5.1) G17(-0.127,5.1) G18(-0.527,5.1) G19(-1.027,5.1) G20(-1.427,5.1) G21(-1.827,5.1) G22(-2.327,5.1) G23(-2.727,5.1) G24(-3.127,5.1) G25(-3.627,5.1) G26(-4.027,5.1) G28(-4.627,4.7) G29(-5.027,4.7) G30(-5.427,4.7) G31(-5.827,4.7) G32(-6.227,4.8) G33(-6.627,4.8) H1(6.373,4.3) H2(5.973,4.3) H3(5.573,4.3) H5(4.773,4.3) H8(3.773,4.7) H9(3.373,4.7) H10(2.873,4.7) H11(2.473,4.7) H12(2.073,4.7) H13(1.573,4.7) H14(1.173,4.7) H15(0.773,4.7) H16(0.273,4.7) H17(-0.127,4.7) H18(-0.527,4.7) H19(-1.027,4.7) H20(-1.427,4.7) H21(-1.827,4.7) H22(-2.327,4.7) H23(-2.727,4.7) H24(-3.127,4.7) H25(-3.627,4.7) H26(-4.027,4.7) H29(-5.027,4.3) H31(-5.827,4.3) H32(-6.227,4.3) H33(-6.627,4.3) J2(5.973,3.9) J3(5.573,3.9) J4(5.173,3.9) J5(4.773,3.9) J6(4.373,3.9) J8(3.773,4.3) J9(3.373,4.3) J10(2.873,4.3) J11(2.473,4.3) J12(2.073,4.3) J13(1.573,4.3) J14(1.173,4.3) J15(0.773,4.3) J16(0.273,4.3) J17(-0.127,4.3) J18(-0.527,4.3) J19(-1.027,4.3) J20(-1.427,4.3) J21(-1.827,4.3) J22(-2.327,4.3) J23(-2.727,4.3) J24(-3.127,4.3) J25(-3.627,4.3) J26(-4.027,4.3) J28(-4.627,3.9) J29(-5.027,3.9) J30(-5.427,3.9) J31(-5.827,3.9) J32(-6.227,3.9) K1(6.373,3.5) K2(5.973,3.5) K3(5.573,3.5) K4(5.173,3.5) K5(4.773,3.5) K6(4.373,3.5) K8(3.773,3.9) K9(3.373,3.9) K10(2.873,3.9) K11(2.473,3.9) K12(2.073,3.9) K13(1.573,3.9) K14(1.173,3.9) K15(0.773,3.9) K16(0.273,3.9) K17(-0.127,3.9) K18(-0.527,3.9) K19(-1.027,3.9) K20(-1.427,3.9) K21(-1.827,3.9) K22(-2.327,3.9) K23(-2.727,3.9) K24(-3.127,3.9) K25(-3.627,3.9) K26(-4.027,3.9) K28(-4.627,3.5) K29(-5.027,3.5) K30(-5.427,3.5) K31(-5.827,3.5) K32(-6.227,3.5) K33(-6.627,3.5) L1(6.373,3.1) L2(5.973,3.1) L3(5.573,3.1) L5(4.773,3.1) L8(3.773,3.4) L9(3.373,3.4) L10(2.873,3.4) L11(2.473,3.4) L12(2.073,3.4) L13(1.573,3.4) L14(1.173,3.4) L15(0.773,3.4) L16(0.273,3.4) L17(-0.127,3.4) L18(-0.527,3.4) L19(-1.027,3.4) L20(-1.427,3.4) L21(-1.827,3.4) L22(-2.327,3.4) L23(-2.727,3.4) L24(-3.127,3.4) L25(-3.627,3.4) L26(-4.027,3.4) L29(-5.027,3.1) L31(-5.827,3.1) L32(-6.227,3.1) L33(-6.627,3.1) M2(5.973,2.7) M3(5.573,2.7) M4(5.173,2.7) M5(4.773,2.7) M6(4.373,2.7) M8(3.773,3) M9(3.373,3) M10(2.873,3) M11(2.473,3) M12(2.073,3) M13(1.573,3) M14(1.173,3) M15(0.773,3) M16(0.273,3) M17(-0.127,3) M18(-0.527,3) M19(-1.027,3) M20(-1.427,3) M21(-1.827,3) M22(-2.327,3) M23(-2.727,3) M24(-3.127,3) M25(-3.627,3) M26(-4.027,3) M28(-4.627,2.7) M29(-5.027,2.7) M30(-5.427,2.7) M31(-5.827,2.7) M32(-6.227,2.7) N1(6.373,2.3) N2(5.973,2.3) N3(5.573,2.3) N4(5.173,2.3) N5(4.773,2.3) N6(4.373,2.3) N8(3.773,2.6) N9(3.373,2.6) N10(2.873,2.6) N11(2.473,2.6) N12(2.073,2.6) N13(1.573,2.6) N14(1.173,2.6) N15(0.773,2.6) N16(0.273,2.6) N17(-0.127,2.6) N18(-0.527,2.6) N19(-1.027,2.6) N20(-1.427,2.6) N21(-1.827,2.6) N22(-2.327,2.6) N23(-2.727,2.6) N24(-3.127,2.6) N25(-3.627,2.6) N26(-4.027,2.6) N28(-4.627,2.3) N29(-5.027,2.3) N30(-5.427,2.3) N31(-5.827,2.3) N32(-6.227,2.3) N33(-6.627,2.3) P1(6.373,1.9) P2(5.973,1.9) P3(5.573,1.9) P5(4.773,1.9) P8(3.773,2.1) P9(3.373,2.1) P10(2.873,2.1) P11(2.473,2.1) P12(2.073,2.1) P13(1.573,2.1) P14(1.173,2.1) P15(0.773,2.1) P16(0.273,2.1) P17(-0.127,2.1) P18(-0.527,2.1) P19(-1.027,2.1) P20(-1.427,2.1) P21(-1.827,2.1) P22(-2.327,2.1) P23(-2.727,2.1) P24(-3.127,2.1) P25(-3.627,2.1) P26(-4.027,2.1) P29(-5.027,1.9) P31(-5.827,1.9) P32(-6.227,1.9) P33(-6.627,1.9) R2(5.973,1.5) R3(5.573,1.5) R4(5.173,1.5) R5(4.773,1.5) R6(4.373,1.5) R8(3.773,1.7) R9(3.373,1.7) R10(2.873,1.7) R11(2.473,1.7) R12(2.073,1.7) R13(1.573,1.7) R14(1.173,1.7) R15(0.773,1.7) R16(0.273,1.7) R17(-0.127,1.7) R18(-0.527,1.7) R19(-1.027,1.7) R20(-1.427,1.7) R21(-1.827,1.7) R22(-2.327,1.7) R23(-2.727,1.7) R24(-3.127,1.7) R25(-3.627,1.7) R26(-4.027,1.7) R28(-4.627,1.5) R29(-5.027,1.5) R30(-5.427,1.5) R31(-5.827,1.5) R32(-6.227,1.5) T1(6.373,1.1) T2(5.973,1.1) T3(5.573,1.1) T4(5.173,1.1) T5(4.773,1.1) T6(4.373,1.1) T8(3.773,1.3) T9(3.373,1.3) T10(2.873,1.3) T11(2.473,1.3) T12(2.073,1.3) T13(1.573,1.3) T14(1.173,1.3) T15(0.773,1.3) T16(0.273,1.3) T17(-0.127,1.3) T18(-0.527,1.3) T19(-1.027,1.3) T20(-1.427,1.3) T21(-1.827,1.3) T22(-2.327,1.3) T23(-2.727,1.3) T24(-3.127,1.3) T25(-3.627,1.3) T26(-4.027,1.3) T28(-4.627,1.1) T29(-5.027,1.1) T30(-5.427,1.1) T31(-5.827,1.1) T32(-6.227,1.1) T33(-6.627,1.1) U1(6.373,0.7) U2(5.973,0.7) U3(5.573,0.7) U5(4.773,0.7) U8(3.773,0.8) U9(3.373,0.8) U10(2.873,0.8) U11(2.473,0.8) U12(2.073,0.8) U13(1.573,0.8) U14(1.173,0.8) U15(0.773,0.8) U16(0.273,0.8) U17(-0.127,0.8) U18(-0.527,0.8) U19(-1.027,0.8) U20(-1.427,0.8) U21(-1.827,0.8) U22(-2.327,0.8) U23(-2.727,0.8) U24(-3.127,0.8) U25(-3.627,0.8) U26(-4.027,0.8) U29(-5.027,0.7) U31(-5.827,0.7) U32(-6.227,0.7) U33(-6.627,0.7) V2(5.973,0.3) V3(5.573,0.3) V4(5.173,0.3) V5(4.773,0.3) V6(4.373,0.3) V8(3.773,0.4) V9(3.373,0.4) V10(2.873,0.4) V11(2.473,0.4) V12(2.073,0.4) V13(1.573,0.4) V14(1.173,0.4) V15(0.773,0.4) V16(0.273,0.4) V17(-0.127,0.4) V18(-0.527,0.4) V19(-1.027,0.4) V20(-1.427,0.4) V21(-1.827,0.4) V22(-2.327,0.4) V23(-2.727,0.4) V24(-3.127,0.4) V25(-3.627,0.4) V26(-4.027,0.4) V28(-4.627,0.3) V29(-5.027,0.3) V30(-5.427,0.3) V31(-5.827,0.3) V32(-6.227,0.3) W1(6.373,-0.1) W2(5.973,-0.1) W3(5.573,-0.1) W4(5.173,-0.1) W5(4.773,-0.1) W6(4.373,-0.1) W8(3.773,0) W9(3.373,0) W10(2.873,0) W11(2.473,0) W12(2.073,0) W13(1.573,0) W14(1.173,0) W15(0.773,0) W16(0.273,0) W17(-0.127,0) W18(-0.527,0) W19(-1.027,0) W20(-1.427,0) W21(-1.827,0) W22(-2.327,0) W23(-2.727,0) W24(-3.127,0) W25(-3.627,0) W26(-4.027,0) W28(-4.627,-0.1) W29(-5.027,-0.1) W30(-5.427,-0.1) W31(-5.827,-0.1) W32(-6.227,-0.1) W33(-6.627,-0.1) Y1(6.373,-0.5) Y2(5.973,-0.5) Y3(5.573,-0.5) Y5(4.773,-0.5) Y8(3.773,-0.5) Y9(3.373,-0.5) Y10(2.873,-0.5) Y11(2.473,-0.5) Y12(2.073,-0.5) Y13(1.573,-0.5) Y14(1.173,-0.5) Y15(0.773,-0.5) Y16(0.273,-0.5) Y17(-0.127,-0.5) Y18(-0.527,-0.5) Y19(-1.027,-0.5) Y20(-1.427,-0.5) Y21(-1.827,-0.5) Y22(-2.327,-0.5) Y23(-2.727,-0.5) Y24(-3.127,-0.5) Y25(-3.627,-0.5) Y26(-4.027,-0.5) Y29(-5.027,-0.5) Y31(-5.827,-0.5) Y32(-6.227,-0.5) Y33(-6.627,-0.5)
  silkscreen extent -7.28,-8.05 7.8,8.05, body extent -7.3,-8.15 7,7.95, height 1.1
CAPC0402(1005)33_L [mm] "Chip Capacitor, Body 1.0x0.5mm, Height 0.33mm, IPC High Density"
  rrect25% 0.5x0.55 smd: 1(-0.45,0) 2(0.45,0)
  silkscreen extent 0,-0.2 0,0.2, body extent -0.5,-0.25 0.5,0.25, height 0.55
CAPC0402(1005)60_L [mm] "Chip Capacitor, Body 1.0x0.5mm, Height 0.6mm, IPC High Density"
  rrect25% 0.5x0.55 smd: 1(-0.45,0) 2(0.45,0)
  silkscreen extent 0,-0.2 0,0.2, body extent -0.5,-0.25 0.5,0.25, height 0.6
CAPC0603(1608)100_L [mm] "Chip Capacitor, Body 1.6x0.8mm, Height 1.0mm, IPC High Density"
  rrect25% 0.66x0.76 smd: 1(-0.7,0) 2(0.7,0)
  silkscreen extent 0,-0.3 0,0.3, body extent -0.8,-0.4 0.8,0.4, height 0.95
CAPC0603X33X15LL03T05 [mm] "Chip Capacitor, 2-Leads, Body 0.60x0.30mm, IPC High Density"
  rect 0.36x0.32 smd: 1(-0.28,0) 2(0.28,0)
  body extent -0.32,-0.17 0.32,0.17, height 0.33
CAPC1005X56X25LL10T15 [mm] "Chip Capacitor, 2-Leads, Body 1.10x0.60mm, IPC High Density"
  rect 0.58x0.54 smd: 1(-0.39,0) 2(0.39,0)
  body extent -0.55,-0.3 0.55,0.3, height 0.56
FH34SRJ30S05SH99 [mm]
  rect 0.3x0.8 smd: 1(7.25,1.15) 2(6.75,1.15) 3(6.25,1.15) 4(5.75,1.15) 5(5.25,1.15) 6(4.75,1.15) 7(4.25,1.15) 8(3.75,1.15) 9(3.25,1.15) 10(2.75,1.15) 11(2.25,1.15) 12(1.75,1.15) 13(1.25,1.15) 14(0.75,1.15) 15(0.25,1.15) 16(-0.25,1.15) 17(-0.75,1.15) 18(-1.25,1.15) 19(-1.75,1.15) 20(-2.25,1.15) 21(-2.75,1.15) 22(-3.25,1.15) 23(-3.75,1.15) 24(-4.25,1.15) 25(-4.75,1.15) 26(-5.25,1.15) 27(-5.75,1.15) 28(-6.25,1.15) 29(-6.75,1.15) 30(-7.25,1.15)
  rect 0.4x0.8 smd: 31(8.25,-1.35) 32(-8.25,-1.35)
  silkscreen extent -8.5,-1.9 8.5,2.5, body extent -8.5,-1.9 8.5,1.9, height 1
FH34SRJ40S05SH50 [mm]
  rect 0.3x0.8 smd: 1(9.75,1.15) 2(9.25,1.15) 3(8.75,1.15) 4(8.25,1.15) 5(7.75,1.15) 6(7.25,1.15) 7(6.75,1.15) 8(6.25,1.15) 9(5.75,1.15) 10(5.25,1.15) 11(4.75,1.15) 12(4.25,1.15) 13(3.75,1.15) 14(3.25,1.15) 15(2.75,1.15) 16(2.25,1.15) 17(1.75,1.15) 18(1.25,1.15) 19(0.75,1.15) 20(0.25,1.15) 21(-0.25,1.15) 22(-0.75,1.15) 23(-1.25,1.15) 24(-1.75,1.15) 25(-2.25,1.15) 26(-2.75,1.15) 27(-3.25,1.15) 28(-3.75,1.15) 29(-4.25,1.15) 30(-4.75,1.15) 31(-5.25,1.15) 32(-5.75,1.15) 33(-6.25,1.15) 34(-6.75,1.15) 35(-7.25,1.15) 36(-7.75,1.15) 37(-8.25,1.15) 38(-8.75,1.15) 39(-9.25,1.15) 40(-9.75,1.15)
  rect 0.4x0.8 smd: 41(10.75,-1.35) 42(-10.75,-1.35)
  silkscreen extent -11,-1.9 11,2.45, body extent -11,-1.9 11,1.9, height 1
FP-0402-L_1_0_0_15-W_0_5-IPC_B [mm]
  rect 0.66x0.662 smd paste+0 mask+0: 1(-0.451,0) 2(0.451,0)
  silkscreen extent -0.78,-0.73 0.78,0.73, body extent -0.5,-0.25 0.5,0.25, height 0.65
FP-ABM13W-MFG [mm]
  rect 0.5x0.4 smd paste+0 mask+0: 1(-0.4,-0.35) 2(0.4,-0.35) 3(0.4,0.35) 4(-0.4,0.35)
  silkscreen extent -1.02,-1.25 1.02,0.55, body extent -0.6,-0.5 0.6,0.5, height 0.33
FP-ABS06-MFG [mm]
  rect 0.75x1.4 smd paste+0 mask+0: 1(-0.725,0) 2(0.725,0)
  silkscreen extent -1.07,-1.08 1.08,1.07, body extent -1,-0.6 1,0.6, height 0.6
FP-AF0201-IPC_B [mm]
  rect 0.454x0.363 smd paste+0 mask+0: 1(-0.304,0) 2(0.304,0)
  silkscreen extent -0.53,-0.58 0.53,0.58, body extent -0.3,-0.15 0.3,0.15, height 0.26
FP-B2B-PH-SM4-TB_LF_SN-MFG [mm]
  rect 1x5.5 smd paste+0 mask+0: 1(-1,-2.25) 2(1,-2.25)
  rect 1.6x3 smd paste+0 mask+0: 3(-3.4,0) 4(3.4,0)
  silkscreen extent -3.98,-5.7 3.97,2.5, body extent -4.3,-5.1 4.3,2.6, height 0.25
FP-B3FS-1012P-MFG [mm]
  rect 1.6x1.4 smd paste+0 mask+0: 1(-4,2.25) 2(4,2.25) 3(-4,-2.25) 4(4,-2.25)
  silkscreen extent -5.6,-3.35 3.2,3.35, body extent -4.9,-3.45 4.9,3.45, height 0.25
FP-BM02B-SURS-TF_LF_SN-MFG [mm]
  rect 0.5x1.1 smd paste+0 mask+0: 1(0.4,-0.95) 2(-0.4,-0.95)
  rect 1.2x1.7 smd paste+0 mask+0: 3(-1.7,0.45) 4(1.7,0.45)
  silkscreen extent -1.9,-2.17 1.9,1, body extent -2.4,-1.6 2.4,1.4, height 0.25
FP-C0201-AB-IPC_A [mm]
  rect 0.554x0.463 smd paste+0 mask+0: 1(-0.354,0) 2(0.354,0)
  silkscreen extent -0.63,-0.63 0.63,0.63
FP-CC0201-BA-IPC_A [mm]
  rect 0.554x0.463 smd paste+0 mask+0: 1(-0.354,0) 2(0.354,0)
  silkscreen extent -0.63,-0.63 0.63,0.63, body extent -0.3,-0.15 0.3,0.15, height 0.33
FP-DRB0008B-IPC_B [mm]
  rect 0.881x0.292 smd paste+0 mask+0: 1(-1.416,0.975)
  rrect100% 0.881x0.292 smd paste+0 mask+0: 2(-1.416,0.325) 3(-1.416,-0.325) 4(-1.416,-0.975) 5(1.416,-0.975) 6(1.416,-0.325) 7(1.416,0.325) 8(1.416,0.975)
  rect 1.65x2.45 smd paste-1000 mask+0: 9(0,0)
  silkscreen extent -2.63,-1.5 1.5,1.5, body extent -2.11,-1.75 2.11,1.75, height 0.25
FP-ERJ1GN-IPC_B [mm]
  rect 0.454x0.363 smd paste+0 mask+0: 1(-0.304,0) 2(0.304,0)
  silkscreen extent -0.53,-0.58 0.53,0.58, body extent -0.3,-0.15 0.3,0.15, height 0.26
FP-EVQ-Q2H03W-MFG [mm]
  rect 1x1 smd paste+0 mask+0: 1(-3.3,0)
  rect 3.2x1 smd paste+0 mask+0: A(-3.4,2) A'(3.4,2) B(-3.4,-2) B'(3.4,-2)
  silkscreen extent -5.87,-3.1 3.35,3.1, body extent -5.1,-3.2 5.1,3.2, height 0.25
FP-GRM033-0_03-MFG [mm]
  rect 0.25x0.3 smd paste+0 mask+0: 1(-0.238,0) 2(0.238,0)
  silkscreen extent -0.31,-0.54 0.31,0.54, body extent -0.3,-0.15 0.3,0.15, height 0.33
FP-GRM035-0_09-IPC_B [mm]
  rect 0.477x0.403 smd paste+0 mask+0: 1(-0.313,0) 2(0.313,0)
  silkscreen extent -0.55,-0.6 0.55,0.6, body extent -0.3,-0.15 0.3,0.15, height 0.55
FP-GRM155-0_2-0_1-IPC_C [mm]
  rect 0.628x0.606 smd paste+0 mask+0: 1(-0.389,0) 2(0.389,0)
  silkscreen extent -0.7,-0.75 0.7,0.75, body extent -0.5,-0.25 0.5,0.25, height 0.5
FP-GRM186-0_2-IPC_A [mil]
  rect 49.42x43.55 smd paste+0 mask+0: 1(-32.5,0) 2(32.5,0)
  silkscreen extent -57,-38 57,38, body extent -77,-41 77,41, height 10
FP-HCJ0201-IPC_C [mm]
  rect 0.354x0.263 smd paste+0 mask+0: 1(-0.254,0) 2(0.254,0)
  silkscreen extent -0.43,-0.56 0.43,0.57, body extent -0.3,-0.15 0.3,0.15, height 0.31
FP-JS203011AQN-MFG [mm]
  rect 1.4x1.4 hole 0.9 paste-2539.97 mask+0: 1(-4,-0.65)
  round 1.4 hole 0.9 paste-2539.97 mask+0: 2(-2,-0.65) 3(2,-0.65) 4(4,-0.65) 5(-4,2.65) 6(-2,2.65) 7(2,2.65) 8(4,2.65)
  silkscreen extent -7.22,-2.8 6.5,2.8, body extent -6.6,-2.9 6.6,3.45, height 0.25
FP-LQM2HPN_J0-IPC_A [mm]
  rect 1.555x2.306 smd paste+0 mask+0: 1(-1.126,0) 2(1.126,0)
  silkscreen extent -1.9,-1.55 1.9,1.55, body extent -2.4,-1.65 2.4,1.65, height 0.25
FP-LQM18DN_70-IPC_B [mm]
  rect 1.106x0.958 smd paste+0 mask+0: 1(-0.676,0) 2(0.676,0)
  silkscreen extent -1.23,-0.88 1.23,0.88, body extent -1.48,-0.73 1.48,0.73, height 0.25
FP-LQM18DN_70-MFG [mm]
  rect 0.65x0.7 smd paste+0 mask+0: 1(-0.675,0) 2(0.675,0)
  silkscreen extent -0.87,-0.77 0.88,0.78, body extent -1.1,-0.58 1.1,0.58, height 0.25
FP-LQP03PN_02-MFG [mm]
  rect 0.3x0.25 smd paste+0 mask+0: 1(-0.275,0) 2(0.275,0)
  silkscreen extent -1.15,-0.52 0.32,0.52, body extent -0.3,-0.15 0.3,0.15, height 0.33
FP-PG-LLGA-5-MFG#1 [mm]
  rect 0.75x0.45 smd paste-1000 mask+0: 1(-0.85,-1.5) 2(-0.85,-0.8) 3(0.85,-1.5) 4(0.85,-0.8)
  round 1.44 smd paste-1000 mask-1000: 5(0,0.68)
  round 0.8 hole 0.8 unplated paste-2539.97 mask+0: ""(0,0.68)
  L1_Top circle w0.46: c0,0.68 r0.81
  silkscreen extent -2.15,-1.62 1.55,2.05, body extent -2.05,-2.55 2.05,2.55, height 0.25
FP-PG-LLGA-5-MFG#2 [mm]
  rect 0.75x0.45 smd paste-1000 mask+0: 1(-0.85,-1.5) 2(-0.85,-0.8) 3(0.85,-1.5) 4(0.85,-0.8)
  round 1.44 smd paste-1000 mask-1000: 5(0,0.68)
  round 0.8 hole 0.8 unplated paste-2539.97 mask+0: ""(0,0.68)
  L1_Top lines w0.46: -0.461,1.346 cw(c0,0.68) 0.461,1.346 cw(c0,0.68) 0.81,0.68 cw(c0,0.68) -0.461,1.346
  silkscreen extent -2.15,-1.62 1.55,2.05, body extent -2.05,-2.55 2.05,2.55, height 0.25
FP-RMCF0201-IPC_A [mm]
  rect 0.554x0.463 smd paste+0 mask+0: 1(-0.354,0) 2(0.354,0)
  silkscreen extent -0.63,-0.63 0.63,0.63, body extent -0.3,-0.15 0.3,0.15, height 0.26
FP-RT0201-IPC_C [mm]
  rect 0.354x0.263 smd paste+0 mask+0: 1(-0.254,0) 2(0.254,0)
  silkscreen extent -0.43,-0.57 0.43,0.56, body extent -0.3,-0.15 0.3,0.15, height 0.26
FP-RUX0012A-MFG [mm]
  rrect25% 1.05x0.4 smd paste+0 mask+0: 1(-0.675,0.35) 2(-0.675,-0.35) 7(0.675,-0.35) 8(0.675,0.35)
  rrect50% 0.2x0.6 smd paste+0 mask+0: 3(-0.75,-1.15) 4(-0.25,-1.15) 5(0.25,-1.15) 6(0.75,-1.15) 9(0.75,1.15) 10(0.25,1.15) 11(-0.25,1.15) 12(-0.75,1.15)
  silkscreen extent -1.87,-1.55 1.3,1.55, body extent -1.3,-1.55 1.3,1.55, height 0.25
FP-SMA-MFG [mm]
  rect 2.5x1.7 smd paste+0 mask+0: 1(-2,0) 2(2,0)
  silkscreen extent -3.92,-1.46 2.3,1.46, body extent -3.35,-1.56 3.35,1.56, height 0.25
FP-SOD128FL-1-CA_MFG [mm]
  rect 1.65x1.65 smd paste-1000 mask+0: 1(-2.075,0) 2(2.075,0)
  silkscreen extent -2.3,-1.48 2.3,1.47, body extent -3,-1.58 3,1.58, height 0.25
FP-SOT23-MFG [mm]
  rect 0.9x0.8 smd paste+0 mask+0: 1(-1,0.95) 2(-1,-0.95) 3(1,0)
  silkscreen extent -0.7,-1.5 0.7,1.5, body extent -1.55,-1.6 1.55,1.6, height 0.25
FP-SOT96-1-MFG [mm]
  rect 1.3x0.6 smd paste+0 mask+0: 1(-2.65,1.905) 2(-2.65,0.635) 3(-2.65,-0.635) 4(-2.65,-1.905) 5(2.65,-1.905) 6(2.65,-0.635) 7(2.65,0.635) 8(2.65,1.905)
  silkscreen extent -4.08,-2.5 1.62,2.5, body extent -3.4,-2.75 3.4,2.75, height 0.25
FUSB302BMPX-Footprint-1 [mm]
  rect 0.7x0.3 smd: 1(-1.3,0.5) 2(-1.3,0) 3(-1.3,-0.5) 8(1.3,-0.5) 9(1.3,0) 10(1.3,0.5)
  rect 0.3x0.7 smd: 4(-0.75,-1.3) 5(-0.25,-1.3) 6(0.25,-1.3) 7(0.75,-1.3) 11(0.75,1.3) 12(0.25,1.3) 13(-0.25,1.3) 14(-0.75,1.3)
  rect 1.5x1.5 smd: 15(0,0)
  silkscreen extent -1.78,1.13 -1.53,1.37, body extent -1.3,-1.3 1.3,1.3, height 0.8
HCTYPEC16PCB10 [mm]
  rect 0.6x1.1 smd: A1(-3.2,3.625) A4(-2.4,3.625) B1(3.2,3.625) B4(2.4,3.625)
  rect 0.3x1.1 smd: A5(-1.25,3.625) A6(-0.25,3.625) A7(0.25,3.625) A8(1.25,3.625) B5(1.75,3.625) B6(0.75,3.625) B7(-0.75,3.625) B8(-1.75,3.625)
  round 2.28 hole 1.52: MH1(-5.62,2.475) MH2(5.62,2.475)
  round 2.85 hole 1.9: MH3(-5.62,-1.525) MH4(5.62,-1.525)
  silkscreen extent -4.47,-3.62 4.47,4.7, body extent -5.07,-3.45 5.07,4.37, height 0.25
JST_BM04B-SURS-TF(LF)(SN) [mm]
  rect 0.5x1.1 smd: 1(-1.2,-0.95) 2(-0.4,-0.95) 3(0.4,-0.95) 4(1.2,-0.95)
  rect 1.2x1.7 smd: S1(-2.5,0.45) S2(2.5,0.45)
  silkscreen extent -2.7,-2.23 2.7,1
LED_WS2812B-B [mm]
  rect 1.5x0.9 smd: 1(-2.45,1.65) 2(-2.45,-1.65) 3(2.45,-1.65) 4(2.45,1.65)
  silkscreen extent -4.07,-2.5 2.5,2.5
QFN50P300X300X80-17N [mm]
  rrect25% 0.84x0.27 smd: 1(-1.435,0.75) 2(-1.435,0.25) 3(-1.435,-0.25) 4(-1.435,-0.75) 9(1.435,-0.75) 10(1.435,-0.25) 11(1.435,0.25) 12(1.435,0.75)
  rrect25% 0.27x0.84 smd: 5(-0.75,-1.435) 6(-0.25,-1.435) 7(0.25,-1.435) 8(0.75,-1.435) 13(0.75,1.435) 14(0.25,1.435) 15(-0.25,1.435) 16(-0.75,1.435)
  rect 1.1x1.1 smd paste-0.2: 17(0,0)
  silkscreen extent -2.57,-1.5 1.5,1.5, body extent -1.5,-1.5 1.5,1.5, height 0.9
RESC0603X26X15NL03T05 [mm] "Chip Resistor, 2-Leads, Body 0.60x0.30mm, IPC Medium Density"
  rect 0.45x0.35 smd: 1(-0.325,0) 2(0.325,0)
  body extent -0.32,-0.16 0.32,0.17, height 0.26
RESC0603X28X15ML05T05 [mm] "Chip Resistor, 2-Leads, Body 0.60x0.30mm, IPC Low Density"
  rect 0.55x0.45 smd: 1(-0.375,0) 2(0.375,0)
  body extent -0.33,-0.17 0.33,0.18, height 0.28
SON127P800X600X80-9N-D [mm]
  rect 0.95x0.45 smd: 1(-3.9,1.905) 2(-3.9,0.635) 3(-3.9,-0.635) 4(-3.9,-1.905) 5(3.9,-1.905) 6(3.9,-0.635) 7(3.9,0.635) 8(3.9,1.905)
  rect 3.45x4.35 smd: 9(0,0)
  silkscreen extent -4.5,2.51 -4.25,2.75, body extent -3.94,-2.92 3.94,2.92, height 0.38